# Altium PCB PCB2.PcbDoc
Units mil, origin at the board's own origin, x right, y up, seen from the top; angles counter-clockwise.
Board outline 3937.01 x 3937.01 mil, 2 copper layers (Top Layer, Bottom Layer); 42 components, 8 nets, 132 pads, 639 vias.
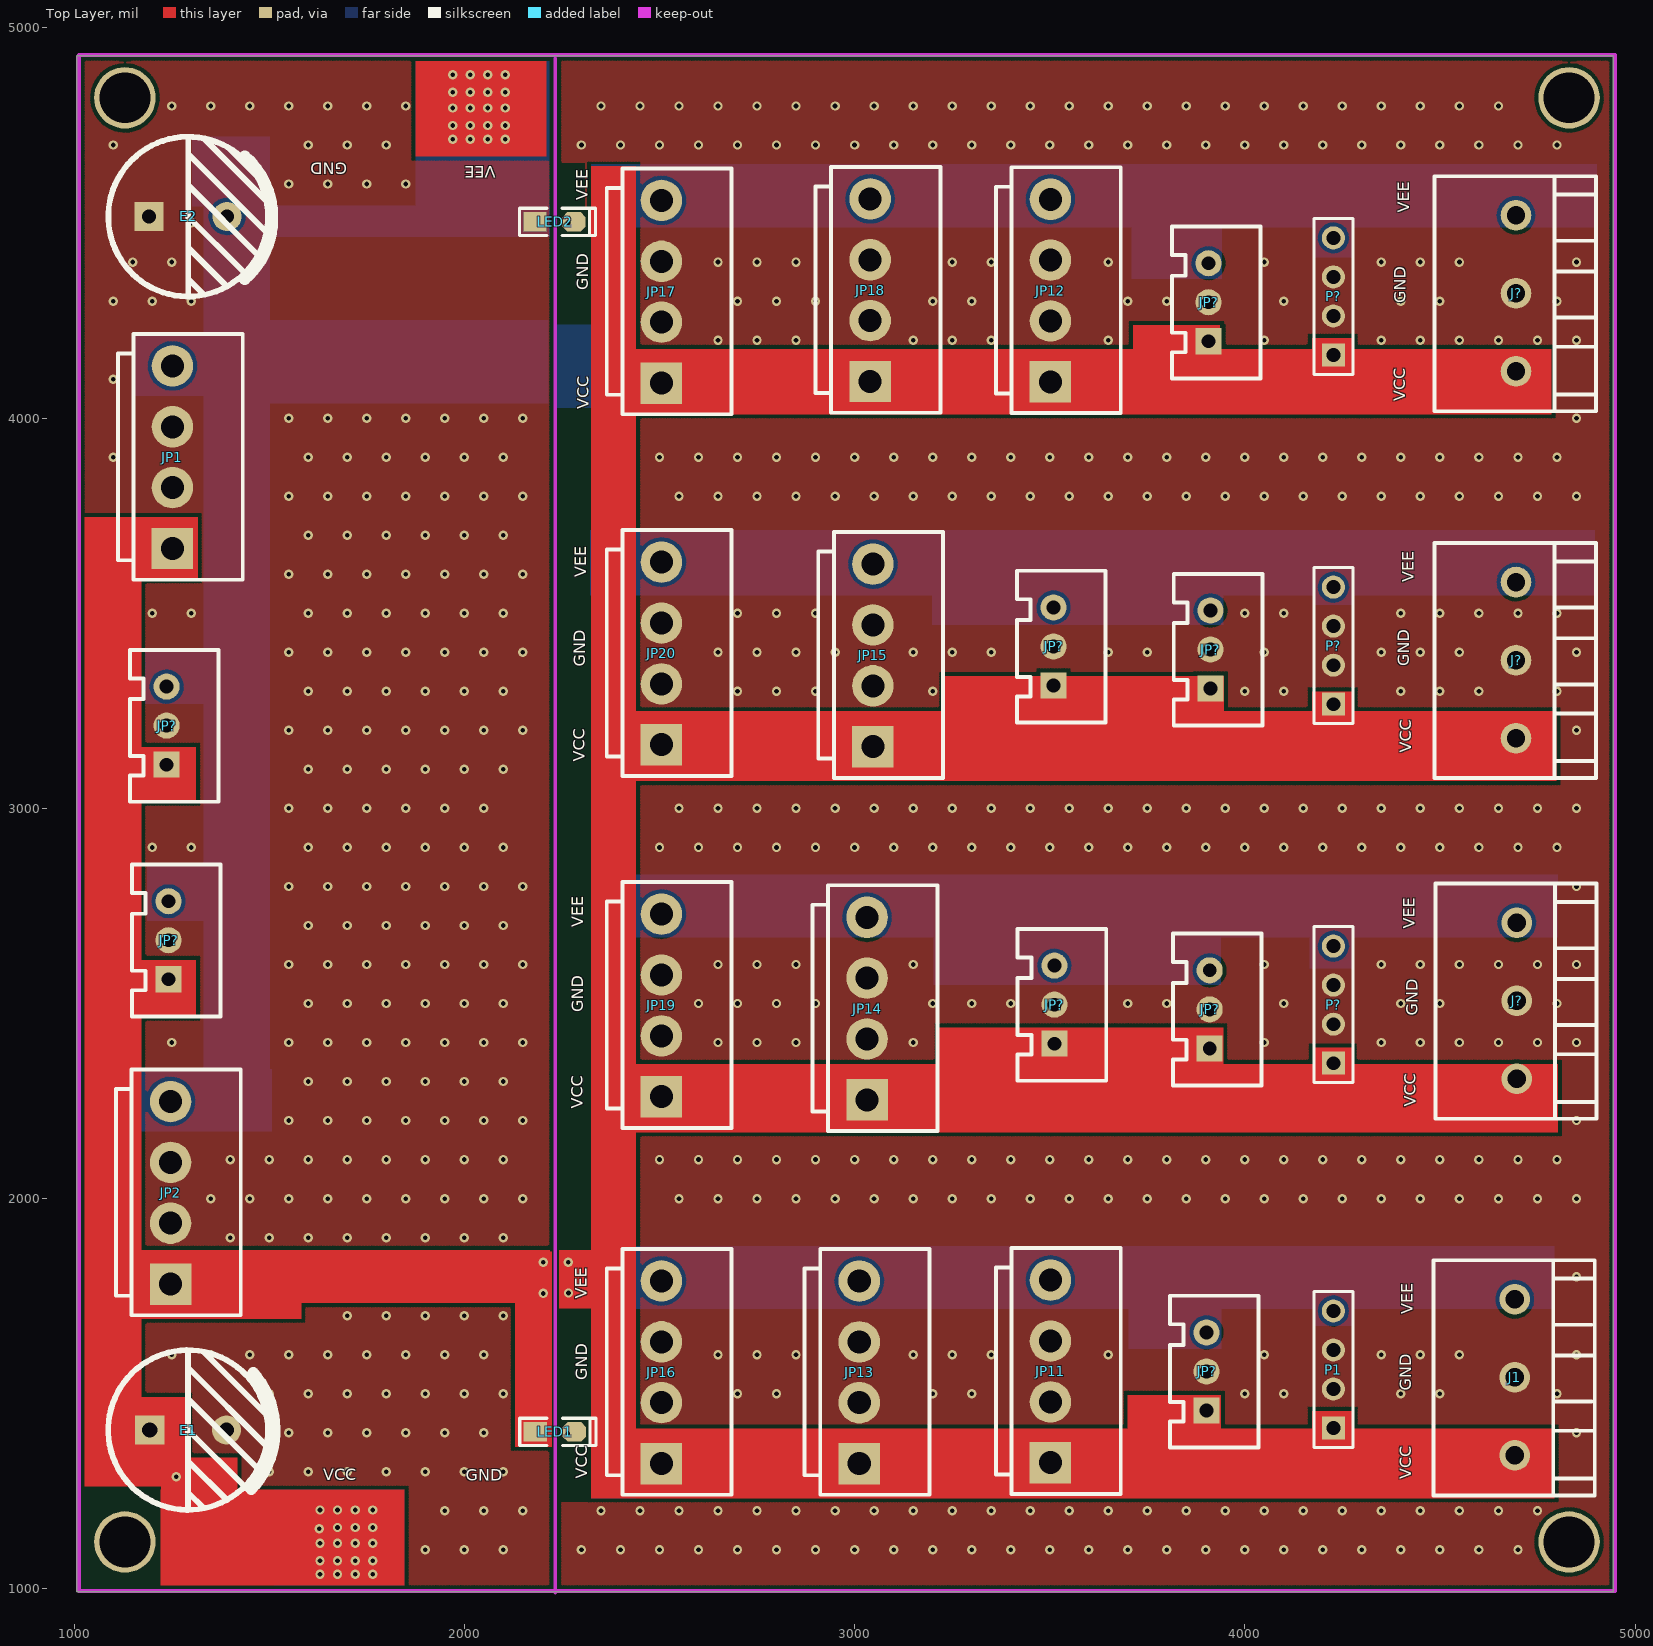
[diagram p0: Top Layer view]
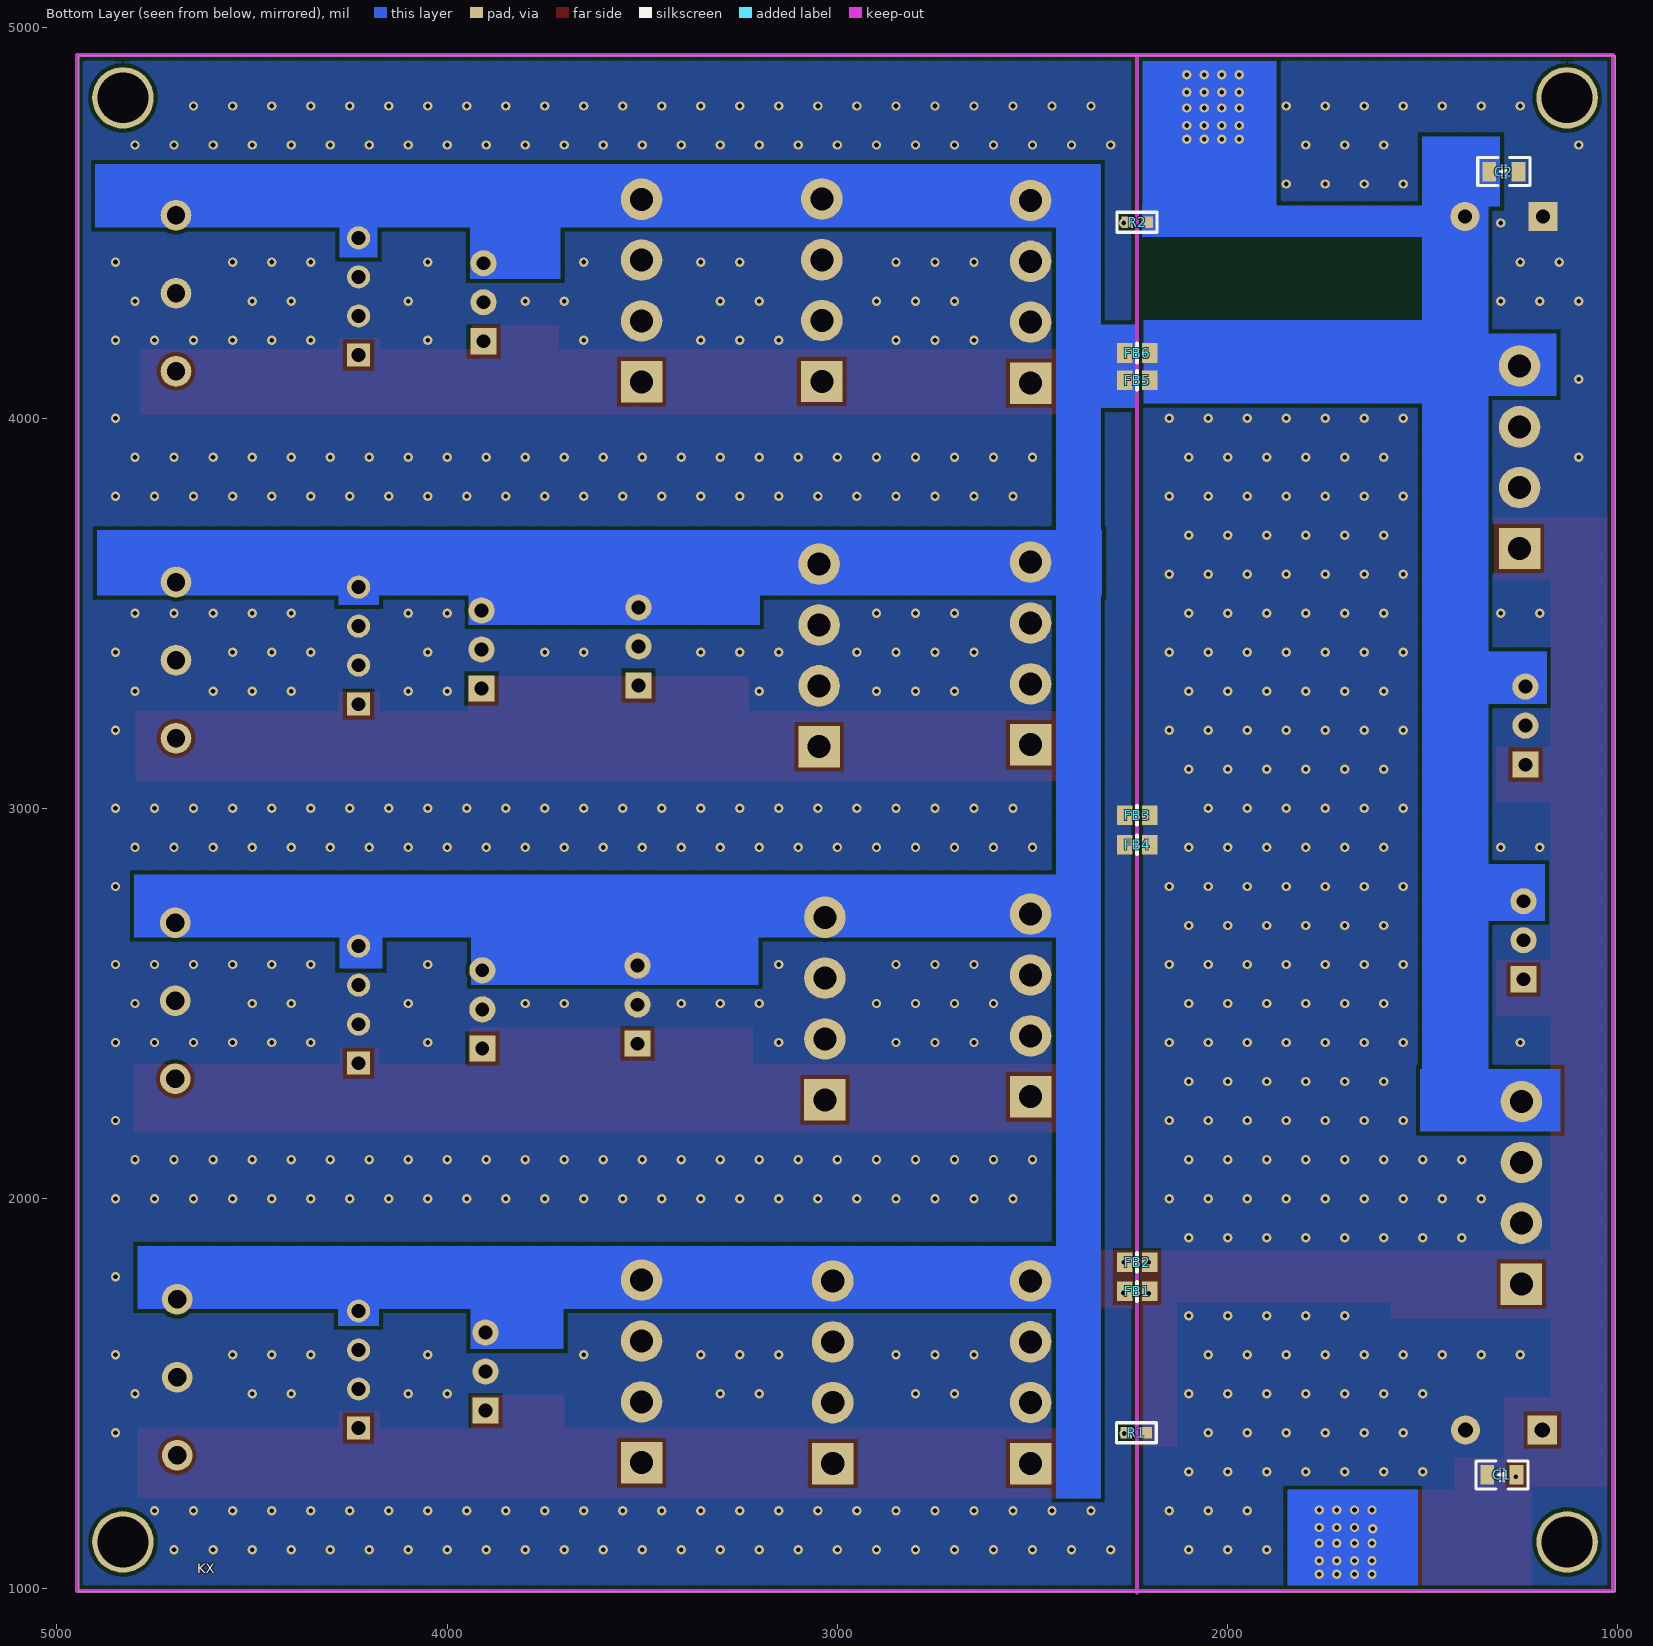
[diagram p1: Bottom Layer view, seen from below]

## Layer stack, top to bottom
Top Solder: solder mask 0.4, Solder Resist, Dk 3.5
Top Layer: signal copper 1.4
Dielectric 1: dielectric 12.6, FR-4, Dk 4.8
Bottom Layer: signal copper 1.4
Bottom Solder: solder mask 0.4, Solder Resist, Dk 3.5

## Board outline
1007.01,992.01 4944.02,992.01 4944.02,4929.02 1007.01,4929.02

## Design rules (kind name [scope] priority, off if disabled: settings)
Clearance [All] p1: gap=10 ignorepadtopadclearanceinfootprint=FALSE except(0: Arc-Hole Track-Hole SMDPad-Hole THPad-Hole Via-Hole Fill-Hole Poly-Hole Region-Hole Text-Hole)
PlaneClearance [All] p1: clearance=10
PlaneConnect [All] p1: planeconnectstyle=Direct reliefexpansion=20 reliefentries=4 reliefconductorwidth=10 reliefairgap=10
PolygonConnect [All] p1: connectstyle=Direct reliefconductorwidth=10 reliefentries=4 polygonreliefangle="90 Angle" airgapwidth=10
RoutingVias [All] p1: holewidth=28 width=50 viastyle="Through Hole" minholewidth=28 minwidth=50 maxholewidth=28 maxwidth=50
SolderMaskExpansion [All] p1: expansion=4
Width [All] p1: maxlimit=10 minlimit=10 preferedwidth=10
28 further rules are at their usual default settings.

## Components (designator, comment, footprint, x,y, rotation, side; value= is the part's Value field where it differs from the comment)
C1 "104" "C 0805_L" 1297.01,1292.01 r0 bottom locked
C2 "104" "C 0805_L" 1292.01,4632.01 r0 bottom locked
E1 "10uF/35V" "CAP 5.0*10*12.5" 1292.01,1407.01 r0 top locked
E2 "10uF/35V" "CAP 5.0*10*16" 1292.01,4517.01 r0 top locked
FB1 "600R" FB-0805 2232.01,1762.01 r0 bottom
FB2 "600R" FB-0805 2232.01,1837.01 r0 bottom
FB3 "600R" FB-0805 2232.01,2982.01 r0 bottom
FB4 "600R" FB-0805 2232.01,2907.01 r0 bottom
FB5 "600R" FB-0805 2232.01,4097.01 r0 bottom
FB6 "600R" FB-0805 2232.01,4167.01 r0 bottom
J1 "接线座-3P" KF128-5.08-3P 4692.01,1742.01 r90 top
J? "接线座-3P" KF128-5.08-3P 4695,4520 r90 top
J? "接线座-3P" KF128-5.08-3P 4695,3580 r90 top
J? "接线座-3P" KF128-5.08-3P 4697.01,2707.01 r90 top
JP1 "HDR-1X4" VH3.96-LI-4P 1252.01,3899.87 r90 top locked
JP2 "HDR-1X4" VH3.96-LI-4P 1247.01,2014.87 r90 top locked
JP11 "HDR-1X4" VH3.96-LI-4P 3502.01,1557.01 r90 top
JP12 "HDR-1X4" VH3.96-LI-4P 3502.01,4327.01 r90 top
JP13 "HDR-1X4" VH3.96-LI-4P 3012.01,1554.87 r90 top
JP14 "HDR-1X4" VH3.96-LI-4P 3032.01,2487.01 r90 top
JP15 "HDR-1X4" VH3.96-LI-4P 3047.01,3392.01 r90 top
JP16 "HDR-1X4" VH3.96-LI-4P 2505,1555 r90 top
JP17 "HDR-1X4" VH3.96-LI-4P 2505,4323.96 r90 top
JP18 "HDR-1X4" VH3.96-LI-4P 3040,4327.86 r90 top
JP19 "HDR-1X4" VH3.96-LI-4P 2505,2495 r90 top
JP20 "HDR-1X4" VH3.96-LI-4P 2505,3397.01 r90 top
JP? "HDR-1X3" XH2.54-LI-3P 3912.01,3407.01 r90 top
JP? "HDR-1X3" XH2.54-LI-3P 3910,2485 r90 top
JP? "HDR-1X3" XH2.54-LI-3P 3902.01,1557.01 r90 top
JP? "HDR-1X3" XH2.54-LI-3P 3512.01,2497.01 r90 top
JP? "HDR-1X3" XH2.54-LI-3P 3510,3415 r90 top
JP? "HDR-1X3" XH2.54-LI-3P 3907.01,4297.01 r90 top
JP? "HDR-1X3" XH2.54-LI-3P 1237.01,3212.01 r90 top locked
JP? "HDR-1X3" XH2.54-LI-3P 1242.01,2662.01 r90 top locked
LED1 "红色" "LED 0805G" 2232.01,1402.01 r0 top
LED2 "蓝色" "LED 0805G" 2231.01,4503.01 r0 top
P1 "Header 4" HDR1X4 4227.01,1412.01 r90 top
P? "Header 4" HDR1X4 4227.01,3267.01 r90 top
P? "Header 4" HDR1X4 4227.01,4162.01 r90 top
P? "Header 4" HDR1X4 4227.01,2347.01 r90 top
R1 "1K" "R 0603_L" 2234,1400 r180 bottom
R2 "1K" "R 0603_L" 2232.01,4502.01 r180 bottom

## Footprints (in the part's own frame and the unit in brackets; to place one, negate y for a bottom-side part, rotate by r counter-clockwise, add the part's x,y. Pads: shape width x height; smd on the part's side, far side on the other; paste and mask are expansions set on the pad)
"C 0805_L" [mil] "无极性贴片电容"
  rect 35x50 smd: 1(-37.4,0) 2(37.4,0)
  silkscreen extent -67,-36 67,36, body extent -39,-24 39,24, height 20
"CAP 5.0*10*12.5" [mm] "脚距5mm直径10mm高度12.5mm"
  rect 1.9x1.9 hole 1: 1(-2.5,0)
  round 1.9 hole 1: 2(2.5,0)
  silkscreen extent -5.2,-5.21 5.64,5.2, body extent -5,-5.01 5.01,4.99, height 12.55
"CAP 5.0*10*16" [mm] "脚距5mm直径10mm高度16mm"
  rect 1.9x1.9 hole 0.9: 1(-2.54,0)
  round 1.9 hole 0.9: 2(2.54,0)
  silkscreen extent -5.19,-5.21 5.5,5.19, body extent -5,-5 5.01,5, height 16.04
FB-0805 [mil]
  rect 39.37x50 smd: 1(-32,0) 2(32,0)
  silkscreen extent 0,-24 0,24, body extent -40,-25 40,25, height 28
HDR1X4 [mm] "Connector; Header; 4 Position"
  rect 1.5x1.5 hole 0.9: 1(0,0)
  round 1.5 hole 0.9: 2(2.54,0) 3(5.08,0) 4(7.62,0)
  silkscreen extent -1.27,-1.27 8.89,1.27
KF128-5.08-3P [mm]
  round 2 hole 1.2: 1(-10.16,0) 2(-5.08,0) 3(0,0)
  silkscreen extent -12.76,-5.2 2.54,5.3, body extent -12.66,-5.1 2.34,5.2, height 14.1
"LED 0805G" [mil] "绿色0805LED"
  rect 60x50 smd: 1(-50,0)
  oct 60x50 smd: 2(50,0)
  silkscreen extent -90,-35 105,35, body extent -39,-25 39,25, height 32
"R 0603_L" [mil] "1/10W贴片电阻"
  rect 30x30 smd: 1(-25.59,0) 2(25.59,0)
  silkscreen extent -51,-26 51,26, body extent -31,-16 31,16, height 16
VH3.96-LI-4P [mm] "接插件，25V/5A"
  rect 2.7x2.7 hole 1.5: 1(-5.94,0)
  round 2.7 hole 1.5: 2(-1.978,0) 3(1.982,0) 4(5.942,0)
  silkscreen extent -7.97,-4.57 8.03,3.56, body extent -7.94,-4.4 7.99,4.16, height 10.5
XH2.54-LI-3P [mm] "接插件，3P"
  rect 1.7x1.7 hole 0.9: 1(-2.54,0)
  round 1.7 hole 0.9: 2(0,0) 3(2.54,0)
  silkscreen extent -4.95,-3.38 4.93,2.39, body extent -5.04,-3.3 5.04,2.4, height 7.03

## Part data
C1 C2: library part C, "无极性贴片电容"
E1 E2: library part C-CAP, "直插电解电容"
FB1 FB2 FB3 FB4 FB5 FB6: library part FB
JP1 JP2 JP11 JP12 JP13 JP14 JP15 JP16 JP17 JP18 JP19 JP20: library part "Header 4", "4P接插件"
JP? JP? JP? JP? JP? JP? JP? JP?: library part "Header 3", "3P接插件"
LED1 LED2: library part LED-SMD, "贴片LED"
P1 P? P? P?: "Header, 4-Pin", LatestRevisionDate=17-Jul-2002, LatestRevisionNote="Re-released for DXP Platform.", Publisher="Altium Limited"
R1 R2: library part R, "贴片电阻"

## Free pads (board coordinates)
  round 157.48 hole 129.92: 12(1130.12,1120.12) 12(1130.12,4820.91) 12(4830.91,1120.12) 12(4830.91,4820.91)

## Via types
v1: diameter 24, hole 12, Top Layer to Bottom Layer, tented both sides, 592 vias
v2: diameter 24, hole 12, Top Layer to Bottom Layer, 47 vias

## Nets (pads, with @x,y where several pads share a name; then routed paths per layer and width w, separated by ;. In a path a pad name is that pad's centre, name@x,y a point inside that pad or via, vN(x,y) a via of type N, cw(c..) or ccw(c..) an arc to the next point about the centre after c; other vN are vias at no path point)
GND: FB3.2 FB4.2 J1.2 J?.2 JP11.2 JP11.3 JP12.2 JP12.3 JP13.2 JP13.3 JP14.2 JP14.3 JP15.2 JP15.3 JP16.2 JP16.3 JP17.2 JP17.3 JP18.2 JP18.3 JP19.2 JP19.3 JP20.2 JP20.3 JP?.2@3510,3415 JP?.2@3512.01,2497.01 JP?.2@3902.01,1557.01 JP?.2@3907.01,4297.01 JP?.2@3910,2485 JP?.2@3912.01,3407.01 P1.2 P1.3 P?.2 P?.3
  other v1: 2300,1100 2400,1100 2500,1100 2600,1100 2700,1100 2800,1100 2900,1100 3000,1100 3100,1100 3200,1100 3300,1100 3400,1100 3500,1100 3600,1100 3700,1100 3800,1100 3900,1100 4000,1100 4100,1100 4200,1100 4300,1100 4400,1100 4500,1100 4600,1100 4700,1100 2350,1200 2450,1200 2550,1200 2650,1200 2750,1200 2850,1200 2950,1200 3050,1200 3150,1200 3250,1200 3350,1200 3450,1200 3550,1200 3650,1200 3750,1200 3850,1200 3950,1200 4050,1200 4150,1200 4250,1200 4350,1200 4450,1200 4550,1200 4650,1200 4750,1200 4850,1400 2700,1500 2800,1500 3200,1500 3300,1500 4000,1500 4100,1500 4400,1500 4500,1500 4800,1500 2650,1600 2750,1600 2850,1600 3150,1600 3250,1600 3350,1600 3650,1600 4050,1600 4350,1600 4450,1600 4550,1600 4850,1600 4850,1800 2550,2000 2650,2000 2750,2000 2850,2000 2950,2000 3050,2000 3150,2000 3250,2000 3350,2000 3450,2000 3550,2000 3650,2000 3750,2000 3850,2000 3950,2000 4050,2000 4150,2000 4250,2000 4350,2000 4450,2000 4550,2000 4650,2000 4750,2000 4850,2000 2500,2100 2600,2100 2700,2100 2800,2100 2900,2100 3000,2100 3100,2100 3200,2100 3300,2100 3400,2100 3500,2100 3600,2100 3700,2100 3800,2100 3900,2100 4000,2100 4100,2100 4200,2100 4300,2100 4400,2100 4500,2100 4600,2100 4700,2100 4800,2100 4850,2200 2650,2400 2750,2400 2850,2400 3150,2400 4050,2400 4350,2400 4450,2400 4550,2400 4650,2400 4750,2400 4850,2400 2600,2500 2700,2500 2800,2500 2900,2500 3200,2500 3300,2500 3400,2500 3700,2500 3800,2500 4100,2500 4400,2500 4500,2500 4800,2500 2650,2600 2750,2600 2850,2600 3150,2600 4050,2600 4350,2600 4450,2600 4550,2600 4650,2600 4750,2600 4850,2600 4850,2800 2500,2900 2600,2900 2700,2900 2800,2900 2900,2900 3000,2900 3100,2900 3200,2900 3300,2900 3400,2900 3500,2900 3600,2900 3700,2900 3800,2900 3900,2900 4000,2900 4100,2900 4200,2900 4300,2900 4400,2900 4500,2900 4600,2900 4700,2900 4800,2900 2550,3000 2650,3000 2750,3000 2850,3000 2950,3000 3050,3000 3150,3000 3250,3000 3350,3000 3450,3000 3550,3000 3650,3000 3750,3000 3850,3000 3950,3000 4050,3000 4150,3000 4250,3000 4350,3000 4450,3000 4550,3000 4650,3000 4750,3000 4850,3000 4850,3200 2700,3300 2800,3300 2900,3300 3200,3300 4000,3300 4100,3300 4400,3300 4500,3300 4600,3300 4800,3300 2650,3400 2750,3400 2850,3400 2950,3400 3150,3400 3250,3400 3350,3400 3650,3400 3750,3400 4050,3400 4350,3400 4450,3400 4550,3400 4850,3400 2700,3500 2800,3500 2900,3500 4000,3500 4100,3500 4400,3500 4500,3500 4600,3500 4700,3500 4800,3500 2550,3800 2650,3800 2750,3800 2850,3800 2950,3800 3050,3800 3150,3800 3250,3800 3350,3800 3450,3800 3550,3800 3650,3800 3750,3800 3850,3800 3950,3800 4050,3800 4150,3800 4250,3800 4350,3800 4450,3800 4550,3800 4650,3800 4750,3800 4850,3800 2500,3900 2600,3900 2700,3900 2800,3900 2900,3900 3000,3900 3100,3900 3200,3900 3300,3900 3400,3900 3500,3900 3600,3900 3700,3900 3800,3900 3900,3900 4000,3900 4100,3900 4200,3900 4300,3900 4400,3900 4500,3900 4600,3900 4700,3900 4800,3900 4850,4000 2650,4200 2750,4200 2850,4200 3150,4200 3250,4200 3350,4200 3650,4200 4050,4200 4350,4200 4450,4200 4550,4200 4650,4200 4750,4200 4850,4200 2700,4300 2800,4300 2900,4300 3200,4300 3300,4300 3700,4300 3800,4300 4100,4300 4400,4300 4500,4300 4800,4300 2650,4400 2750,4400 2850,4400 3250,4400 3350,4400 3650,4400 4050,4400 4350,4400 4450,4400 4550,4400 4850,4400 2300,4700 2400,4700 2500,4700 2600,4700 2700,4700 2800,4700 2900,4700 3000,4700 3100,4700 3200,4700 3300,4700 3400,4700 3500,4700 3600,4700 3700,4700 3800,4700 3900,4700 4000,4700 4100,4700 4200,4700 4300,4700 4400,4700 4500,4700 4600,4700 4700,4700 4800,4700 2350,4800 2450,4800 2550,4800 2650,4800 2750,4800 2850,4800 2950,4800 3050,4800 3150,4800 3250,4800 3350,4800 3450,4800 3550,4800 3650,4800 3750,4800 3850,4800 3950,4800 4050,4800 4150,4800 4250,4800 4350,4800 4450,4800 4550,4800 4650,4800
GNDin: C1.2 C2.1 E1.2 E2.1 FB3.1 FB4.1 JP1.2 JP1.3 JP2.2 JP2.3 JP?.2@1237.01,3212.01 JP?.2@1242.01,2662.01 LED2.1 R1.2
  other v1: 1900,1100 2000,1100 2100,1100 1950,1200 2050,1200 2150,1200 1500,1300 1600,1300 1700,1300 1800,1300 1900,1300 2000,1300 2100,1300 1550,1400 1650,1400 1750,1400 1850,1400 1950,1400 2050,1400 1500,1500 1600,1500 1700,1500 1800,1500 1900,1500 2000,1500 2100,1500 1250,1600 1350,1600 1450,1600 1550,1600 1650,1600 1750,1600 1850,1600 1950,1600 2050,1600 1700,1700 1800,1700 1900,1700 2000,1700 2100,1700 1400,1900 1500,1900 1600,1900 1700,1900 1800,1900 1900,1900 2000,1900 2100,1900 1350,2000 1450,2000 1550,2000 1650,2000 1750,2000 1850,2000 1950,2000 2050,2000 2150,2000 1400,2100 1500,2100 1600,2100 1700,2100 1800,2100 1900,2100 2000,2100 2100,2100 1550,2200 1650,2200 1750,2200 1850,2200 1950,2200 2050,2200 2150,2200 1600,2300 1700,2300 1800,2300 1900,2300 2000,2300 2100,2300 1250,2400 1550,2400 1650,2400 1750,2400 1850,2400 1950,2400 2050,2400 2150,2400 1600,2500 1700,2500 1800,2500 1900,2500 2000,2500 2100,2500 1550,2600 1650,2600 1750,2600 1850,2600 1950,2600 2050,2600 2150,2600 1600,2700 1700,2700 1800,2700 1900,2700 2000,2700 2100,2700 1550,2800 1650,2800 1750,2800 1850,2800 1950,2800 2050,2800 2150,2800 1200,2900 1300,2900 1600,2900 1700,2900 1800,2900 1900,2900 2000,2900 2100,2900 1550,3000 1650,3000 1750,3000 1850,3000 1950,3000 2050,3000 1600,3100 1700,3100 1800,3100 1900,3100 2000,3100 2100,3100 1550,3200 1650,3200 1750,3200 1850,3200 1950,3200 2050,3200 2150,3200 1600,3300 1700,3300 1800,3300 1900,3300 2000,3300 2100,3300 1550,3400 1650,3400 1750,3400 1850,3400 1950,3400 2050,3400 2150,3400 1200,3500 1300,3500 1600,3500 1700,3500 1800,3500 1900,3500 2000,3500 2100,3500 1550,3600 1650,3600 1750,3600 1850,3600 1950,3600 2050,3600 2150,3600 1600,3700 1700,3700 1800,3700 1900,3700 2000,3700 2100,3700 1550,3800 1650,3800 1750,3800 1850,3800 1950,3800 2050,3800 2150,3800 1100,3900 1600,3900 1700,3900 1800,3900 1900,3900 2000,3900 2100,3900 1550,4000 1650,4000 1750,4000 1850,4000 1950,4000 2050,4000 2150,4000 1100,4100 1100,4300 1200,4300 1300,4300 1150,4400 1250,4400 1300,4500 1550,4600 1650,4600 1750,4600 1850,4600 1100,4700 1600,4700 1700,4700 1800,4700 1250,4800 1350,4800 1450,4800 1550,4800 1650,4800 1750,4800 1850,4800
NetLED1_2: LED1.2 R1.1
  other v2: 2265.01,1398.01
NetLED2_2: LED2.2 R2.1
  other v2: 2266.01,4500.01
VCC: FB1.2 FB2.2 J1.1 J?.1 JP11.1 JP12.1 JP13.1 JP14.1 JP15.1 JP16.1 JP17.1 JP18.1 JP19.1 JP20.1 JP?.1@3510,3315 JP?.1@3512.01,2397.01 JP?.1@3902.01,1457.01 JP?.1@3907.01,4197.01 JP?.1@3910,2385 JP?.1@3912.01,3307.01 P1.1 P?.1
  other v2: 2267.01,1758.01 2266.01,1837.01
VCCin: C1.1 E1.1 FB1.1 FB2.1 JP1.1 JP2.1 JP?.1@1237.01,3112.01 JP?.1@1242.01,2562.01 LED1.1
  other v2: 1630,1037 1675,1037 1720,1037 1765,1037 1630,1072 1675,1072 1720,1072 1765,1072 1630,1117 1675,1117 1720,1117 1765,1117 1628,1154 1675,1157 1720,1157 1765,1157 1630,1202 1675,1202 1720,1202 1765,1202 1262,1287 2202.01,1757.01 2202.01,1837.01
VEE: FB5.2 FB6.2 J1.3 J?.3 JP11.4 JP12.4 JP13.4 JP14.4 JP15.4 JP16.4 JP17.4 JP18.4 JP19.4 JP20.4 JP?.3@3510,3515 JP?.3@3512.01,2597.01 JP?.3@3902.01,1657.01 JP?.3@3907.01,4397.01 JP?.3@3910,2585 JP?.3@3912.01,3507.01 P1.4 P?.4
VEEin: C2.2 E2.2 FB5.1 FB6.1 JP1.4 JP2.4 JP?.3@1237.01,3312.01 JP?.3@1242.01,2762.01 R2.2
  other v2: 1970,4715 2015,4715 2060,4715 2105,4715 1970,4750 2015,4750 2060,4750 2105,4750 1970,4795 2015,4795 2060,4795 2105,4795 1970,4835 2015,4835 2060,4835 2105,4835 1970,4880 2015,4880 2060,4880 2105,4880

## Polygon pours and split planes (outlines as drawn)
GND on Top Layer (hatched 90Degree grid 4 track 5, remove dead copper, pour order 36): 2236.98,4916 4945,4916 4954,4925 4954,988 2236.98,988
GNDin on Top Layer (hatched 90Degree grid 4 track 5, remove dead copper, pour order 30): 1012.01,4931 1021.01,4922 2232,4922 2232,994 1012.01,994
no net on Top Layer "Top Layer-No Net" (hatched 90Degree grid 4 track 5, remove dead copper, pour order 16): 1012.01,4931 1016.01,4927 2232.01,4927
no net on Top Layer "Top Layer-No Net 1" (hatched 90Degree grid 4 track 5, remove dead copper, pour order 18): 1012.01,4931
GNDin on Bottom Layer (hatched 90Degree grid 4 track 5, remove dead copper, pour order 34): 1012.01,4931 1021.01,4922 2232,4922 2232,994 1012.01,994
GND on Bottom Layer (hatched 90Degree grid 4 track 5, remove dead copper, pour order 32): 2232,4922 4940.02,4922 4949.02,4931 4949.02,994 2232,994
no net on Bottom Layer (hatched 90Degree grid 4 track 5, remove dead copper, pour order 28): 1002,4932

## Keep-outs
Top Layer:
  lines w10: 2233,990 2233,4922
Bottom Layer:
  lines w10: 2232,990 2232,4922
Keep-Out Layer:
  lines w10: 1012.01,994 4949.02,994 4949.02,4931 1012.01,4931 1012.01,994

## Other copper
Top Layer:
  rectangle net VCCin: 2130,1364 2224,1865
  rectangle net VCC: 2242,1718 2435,1868
  rectangle net VCCin: 1221,1009 1847,1254
  rectangle net VEEin: 1875,4670 2210,4915
  rectangle net VCCin: 1027.01,1262.01 1172.01,3747.01
  rectangle net VCCin: 1027.01,1262.01 1292.01,1492.01
  rectangle net VCCin: 1037.01,1692.01 1582.01,1868
  rectangle net VCCin: 1097.01,2467.01 1312.01,2612.01
  rectangle net VCCin: 1027.01,3017.01 1312.01,3157.01
  rectangle net VCCin: 1072.01,3587.01 1317.01,3747.01
  rectangle net VCCin: 1222.01,1017.01 1418.86,1337.01
  rectangle net VCCin: 1569,1732 2219,1868
  rectangle net VCC: 2325,1235 2440,4646
  rectangle net VCC: 2325,1232.01 4794,1411.01
  rectangle net VCC: 2330,2170 4803,2345.01
  rectangle net VCC: 2325,3070.01 4799,3249.01
  rectangle net VCC: 2325,4010 4786,4177.01
  rectangle net VCC: 3713.01,4136.01 3937.01,4239.01
  rectangle net VCC: 4172.01,4106.01 4279.01,4206.01
  rectangle net VCC: 3227,3201 3947,3339
  rectangle net VCC: 4172.01,3220.01 4279.01,3300.01
  rectangle net VCC: 3216,2307 3945,2439
  rectangle net VCC: 4175.01,2303.01 4276.01,2387.01
  rectangle net VCC: 3700.01,1381.01 3939.01,1497.01
  rectangle net VCC: 4172.01,1369.01 4279.01,1456.01
  pour cut-out: 2312,4536 2308,4540 2248,4540 2248,4660 2252,4656 2312,4656
  pour cut-out: 2240,1704 2312,1704 2316,1220 2240,1220
Bottom Layer:
  rectangle net VEEin: 1875,4464 2218,4915
  rectangle net VCCin: 1512,1009 1847,1254
  rectangle net VEEin: 1875,4670 2210,4915
  rectangle net VEEin: 1332.01,2172.01 1502.01,4717.01
  rectangle net VEEin: 1157.01,4057.01 1457.01,4217.01
  rectangle net VEEin: 1302.01,4542.01 1502.01,4722.01
  rectangle net VEEin: 1147.01,2172.01 1507.01,2332.01
  rectangle net VEEin: 1187.01,2712.01 1497.01,2857.01
  rectangle net VEEin: 1182.01,3267.01 1502.01,3402.01
  rectangle net VEEin: 1332.01,4037.01 2215,4252.01
  rectangle net VEEin: 1470.01,4464.01 2220,4545.01
  rectangle net VEE: 2236.99,4026 2339,4240
  rectangle net VEE: 2325,1232 2440,4651.01
  rectangle net VEE: 2325,4489.01 4902,4651.01
  rectangle net VEE: 2322,3545 4898,3713.01
  rectangle net VEE: 2337,2669.01 4803,2831.01
  rectangle net VEE: 2325,1717.01 4794,1879.01
  rectangle net VEE: 3202.01,2548.01 3939.01,2820.01
  rectangle net VEE: 4166.01,2590.01 4276.01,2715.01
  rectangle net VEE: 3199.01,3470.01 3945,3679.01
  rectangle net VEE: 4175.01,3521.01 4279.01,3637.01
  rectangle net VEE: 3710.01,4357.01 3942.01,4503.01
  rectangle net VEE: 4178.01,4412.01 4276.01,4515.01
  rectangle net VEE: 3702.01,1614.01 3940.01,1767.01
  rectangle net VEE: 4175.01,1674.01 4280.01,1761.01

## Silkscreen, mask and mechanical layers (free items; w line width, h text height)
Top Overlay:
  text "GND" at 1700,4654 h30 r180
  text "VEE" at 2081,4646 h30 r180
  text "VEE" at 2316,4558 h30 r90
  text "VEE" at 4421.01,4526.01 h30 r90
  text "GND" at 2317.01,4328.01 h30 r90
  text "GND" at 4413.01,4294.01 h30 r90
  text "VCC" at 4411.01,4043.01 h30 r90
  text "VCC" at 2319,4023 h30 r90
  text "VEE" at 2312,3592 h30 r90
  text "VEE" at 4433.01,3579.01 h30 r90
  text "GND" at 4422.01,3364.01 h30 r90
  text "GND" at 2310.01,3363.01 h30 r90
  text "VCC" at 4427.01,3142.01 h30 r90
  text "VCC" at 2309,3120 h30 r90
  text "VEE" at 2305.01,2695.01 h30 r90
  text "VEE" at 4436.01,2692.01 h30 r90
  text "GND" at 2305.01,2478.01 h30 r90
  text "GND" at 4443.01,2469.01 h30 r90
  text "VCC" at 4438.01,2235.01 h30 r90
  text "VCC" at 2304.01,2230.01 h30 r90
  text "VEE" at 2313.01,1744.01 h30 r90
  text "VEE" at 4431.01,1704.01 h30 r90
  text "GND" at 2315.01,1535.01 h30 r90
  text "GND" at 4426.01,1508.01 h30 r90
  text "VCC" at 2315.01,1282.01 h30 r90
  text "VCC" at 4427.01,1281.01 h30 r90
  text "VCC" at 1638,1278 h30
  text "GND" at 2003,1277 h30
Bottom Overlay:
  text "KX" at 4640,1040 h24
Top Solder:
  rectangle: 1512.01,1010 1847.01,1255
  rectangle: 1874,1013 2219,1260
  rectangle: 1875,4670 2210,4915
  rectangle: 1512.01,4668 1857,4914.01
Bottom Solder:
  rectangle: 1875,4670 2210,4915
  rectangle: 1512.01,4668 1857,4914.01
  rectangle: 1512.01,1010 1847.01,1255
  rectangle: 1875,1013 2210,1258